# EAGLE board Xbee Communications Board (EAGLE 9.6.1)
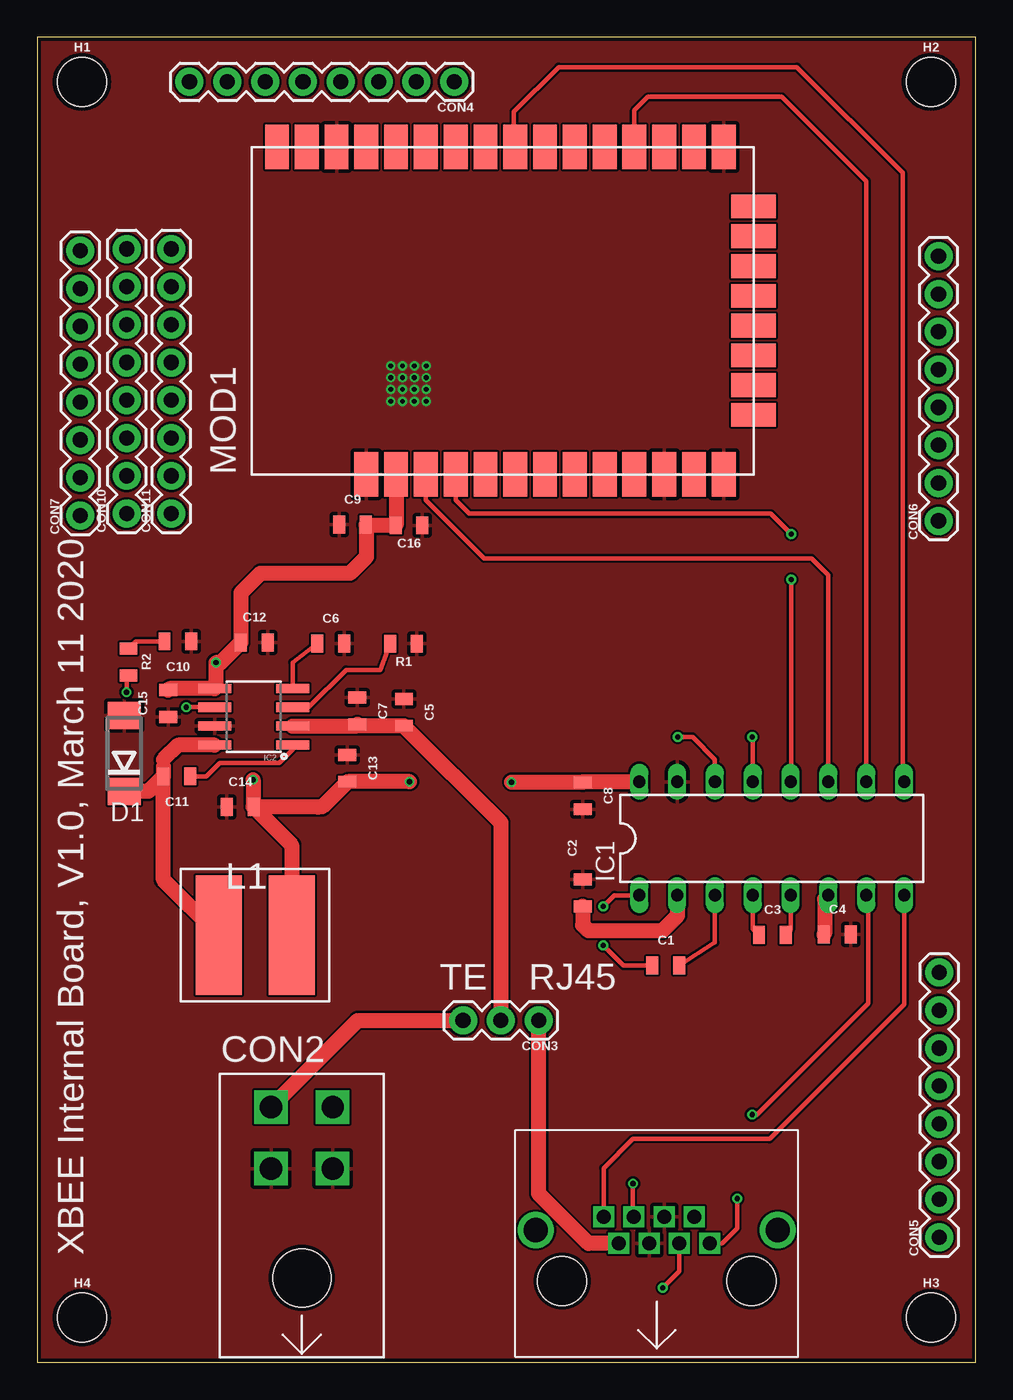
[diagram p0: board, top side]
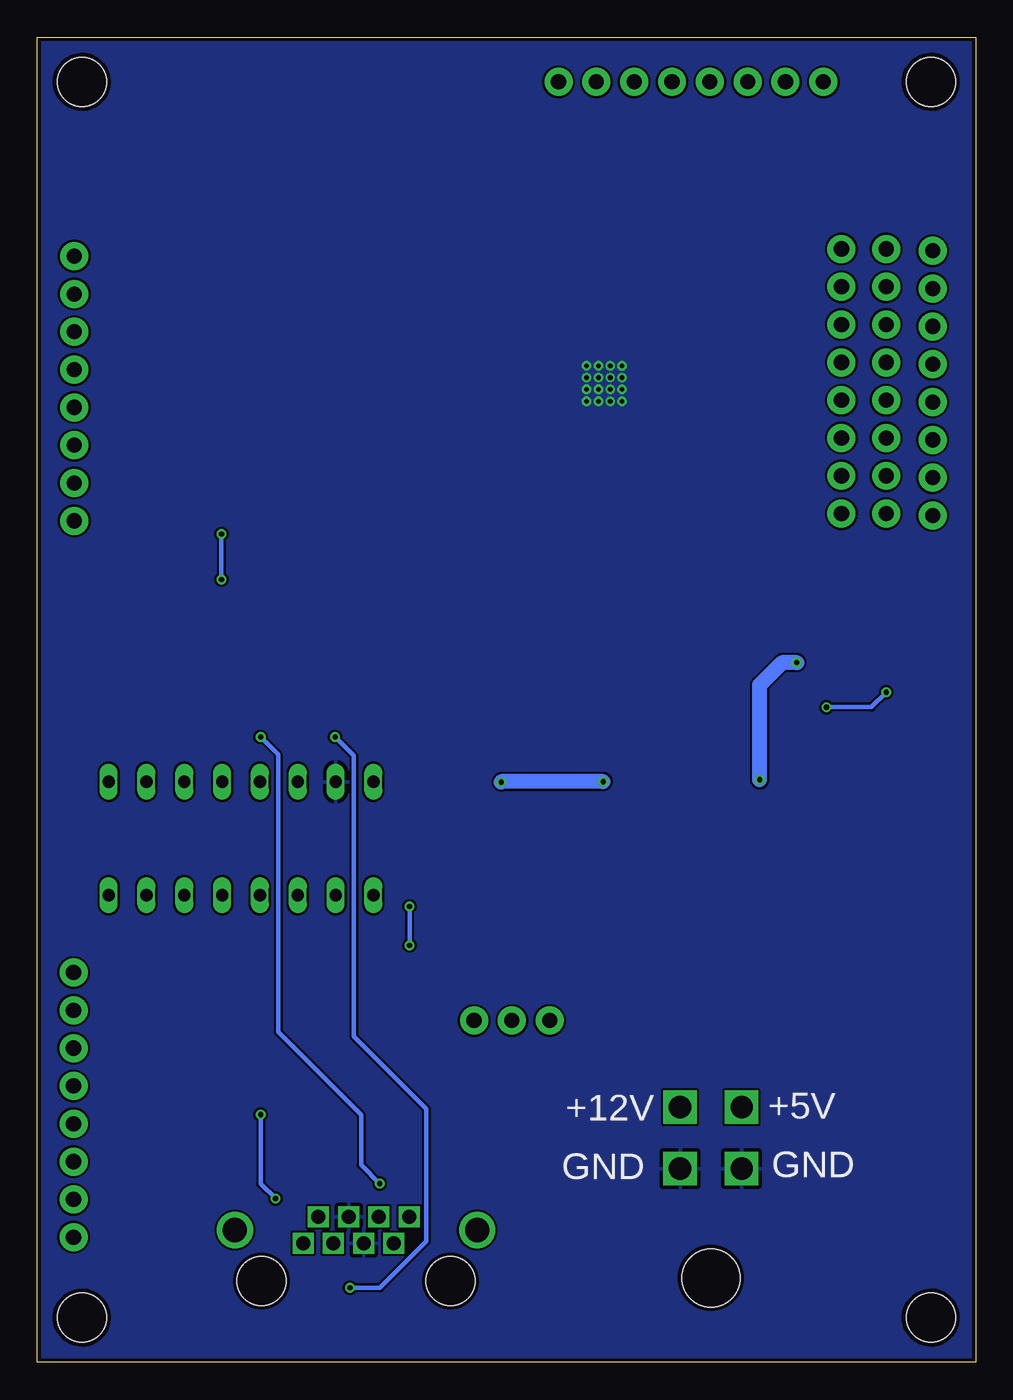
[diagram p1: board, bottom side, seen from below]

Size 63 x 89 mm. Coordinates in mm from the lower left corner, seen from the top.
Outline: 0,0 63,0 63,89 0,89 0,0
Copper layers (1*16): Top 0.035mm / dielectric 1.5mm / Bottom 0.035mm
Design rules "JLCPCB2Layer": minimum track width 6mil, minimum drill 10mil, track to track 6mil, track to pad 6mil, pad to pad 6mil, via to via 6mil, smd to smd 0mil, copper to edge 10mil, drill to drill 10mil, minimum pad ring 6mil, minimum via ring 6mil, stop-mask expansion 2mil, vias tented up to drill 100mil, thermal gap 10mil

## Footprints (pad centres in the part's own frame; a part is rotated, then mirrored left to right if it is on the bottom)
0805 = smd 0.8 x 1.2: 1 -0.9,0; 2 0.9,0
RJ45 = drill 0.94 square: 1 9.9,2.54; 2 8.88,4.32; 3 7.87,2.54; 4 6.85,4.32; 5 5.84,2.54; 6 4.82,4.32; 7 3.81,2.54; 8 2.79,4.32 | drill 1.62: 9 -1.78,3.43; 10 14.48,3.43 | hole 3.3: 0,0; 12.7,0
TE_4-PIN = drill 1.5 square: 1 2.07,11.48; 2 -2.07,11.48; 3 2.07,7.34; 4 -2.07,7.34 | hole 3.91: 0,0
1X03 = drill 1.016 pad 1.88: 1 0,0; 2 2.54,0; 3 5.08,0
1X08 = drill 1.016 pad 1.88: 1 0,0; 2 2.54,0; 3 5.08,0; 4 7.62,0; 5 10.16,0; 6 12.7,0; 7 15.24,0; 8 17.78,0
DO214AA = smd 1.8 x 2.2: A 2.55,0; C -2.55,0
STAND-OFF = hole 3.302: 0,0
DIP16 = drill 0.813 long: 1 -8.89,-3.81; 2 -6.35,-3.81; 3 -3.81,-3.81; 4 -1.27,-3.81; 5 1.27,-3.81; 6 3.81,-3.81; 7 6.35,-3.81; 8 8.89,-3.81; 9 8.89,3.81; 10 6.35,3.81; 11 3.81,3.81; 12 1.27,3.81; 13 -1.27,3.81; 14 -3.81,3.81; 15 -6.35,3.81; 16 -8.89,3.81
SOIC8 = smd 0.61 x 2.21: 1 -1.905,-2.616; 2 -0.635,-2.616; 3 0.635,-2.616; 4 1.905,-2.616; 5 1.905,2.616; 6 0.635,2.616; 7 -0.635,2.616; 8 -1.905,2.616
INDUCTOR_MURATA_DEM8030C = smd 3.1 x 8: P$1 0,0; P$2 4.9,0
XBEE_SX = smd 3 x 1.6: 1 0,24; 2 0,22; 3 0,20; 4 0,18; 5 0,16; 6 0,14; 7 0,12; 8 0,10; 9 0,8; 10 0,6; 11 0,4; 12 0,2; 13 0,0; 22 22,0; 23 22,2; 24 22,4; 25 22,6; 26 22,8; 27 22,10; 28 22,12; 29 22,14; 30 22,16; 31 22,18; 32 22,20; 33 22,22; 34 22,24; 35 22,26; 36 22,28; 37 22,30 | smd 1.6 x 3: 14 4,-2; 15 6,-2; 16 8,-2; 17 10,-2; 18 12,-2; 19 14,-2; 20 16,-2; 21 18,-2 | drill 0.32 pad 0.56: 38_1 4.919,22.359; 38_2 5.713,22.359; 38_3 6.506,22.359; 38_4 7.3,22.359; 38_5 4.919,21.565; 38_6 5.713,21.565; 38_7 6.506,21.565; 38_8 7.3,21.565; 38_9 4.919,20.771; 38_10 5.713,20.771; 38_11 6.506,20.771; 38_12 7.3,20.771; 38_13 4.919,19.977; 38_14 5.713,19.977; 38_15 6.506,19.977; 38_16 7.3,19.977

## Placement (x,y rotation side)
C1  0.1uf  [0805]  42.21,26.65 0 top
C2  0.1uf  [0805]  36.62,31.53 90 top
C3  0.1uf  [0805]  49.36,28.71 0 top
C4  0.1uf  [0805]  53.71,28.73 0 top
C5  10uf  [0805]  24.62,43.65 270 top
C6  10uf  [0805]  19.7,48.27 0 top
C7  0.1uf  [0805]  21.49,43.75 270 top
C8  0.1uf  [0805]  36.64,38.05 270 top
C9  100pf  [0805]  21.17,56.26 0 top
C10  2.2nf  [0805]  9.45,48.43 180 top
C11  0.1uf  [0805]  9.37,39.36 180 top
C12  10uf  [0805]  14.58,48.35 0 top
C13  10uf  [0805]  20.83,39.89 270 top
C14  10uf  [0805]  13.63,37.3 0 top
C15  0.1uf  [0805]  8.79,44.25 90 top
C16  1uf  [0805]  24.96,56.21 180 top
CON1  RJ45  [RJ45]  35.25,5.45 0 top
CON2  TE_4-PIN  [TE_4-PIN]  17.77,5.67 0 top
CON3  1X03  [1X03]  33.67,22.96 180 top
CON4  1X08  [1X08]  28,86 180 top
CON5  1X08  [1X08]  60.56,8.4 90 top
CON6  1X08  [1X08]  60.52,56.52 90 top
CON7  1X08  [1X08]  2.88,56.88 90 top
CON10  1X08  [1X08]  6,57 90 top
CON11  1X08  [1X08]  9,57 90 top
D1  [DO214AA]  5.83,40.9 90 top
H1  STAND-OFF  [STAND-OFF]  3,86 0 top
H2  STAND-OFF  [STAND-OFF]  60,86 0 top
H3  STAND-OFF  [STAND-OFF]  60,3 0 top
H4  STAND-OFF  [STAND-OFF]  3,3 0 top
IC1  RS232-TTL_ICL3232  [DIP16]  49.31,35.18 0 top
IC2  BUCK_TPS5403  [SOIC8]  14.53,43.36 90 top
L1  10uH  [INDUCTOR_MURATA_DEM8030C]  12.18,28.69 0 top
MOD1  XBEE_SX  [XBEE_SX]  46.09,59.63 90 top
R1  47k  [0805]  24.59,48.26 180 top
R2  47k  [0805]  6.13,47.04 270 top

## Library data of the parts
C1-C16 L1 R1 R2 = EcoCar-Passives
CON1 CON2 = EcoCar-Connectors
CON3-CON7 CON10 CON11 = EcoCar-Connectors-2.54mm
D1 = EcoCar-Discrete-Semiconductors
H1-H4 = EcoCar-Miscellaneous
IC1 IC2 = EcoCar-Integrated-Circuits
MOD1 = EcoCar-Modules

## Nets
3.3V: C8.1 C9.2 C12.1 C13.2 C14.2 C15.2 C16.2 IC1.16 IC2.5 L1.P$2 MOD1.2
5V: CON2.2 CON3.3
!CTS: CON1.8 IC1.8
!RTR: CON1.1 IC1.7
BOOT: C11.1 IC2.1
C1+: C1.1 IC1.1
C1-: C1.2 IC1.3
C2+: C3.1 IC1.4
C2-: C3.2 IC1.5
COMP: IC2.6 R2.2
CTS_XBEE: IC1.9 MOD1.29
GND: C2.2 C4.2 C5.1 C6.2 C7.1 C8.2 C9.1 C10.1 C12.2 C13.1 C14.1 C15.1 C16.1 CON1.4 CON1.5 CON2.3 CON2.4 D1.A IC1.15 IC2.7 MOD1.1 MOD1.11 MOD1.13 MOD1.22 MOD1.35 MOD1.38_1 MOD1.38_2 MOD1.38_3 MOD1.38_4 MOD1.38_5 MOD1.38_6 MOD1.38_7 MOD1.38_8 MOD1.38_9 MOD1.38_10 MOD1.38_11 MOD1.38_12 MOD1.38_13 MOD1.38_14 MOD1.38_15 MOD1.38_16 R1.1
LX: C11.2 D1.C IC2.8 L1.P$1
N$2: C10.2 R2.1
N/C: CON1.2
POWER: CON1.7 CON3.1
ROSC: IC2.3 R1.2
RTS_XBEE: IC1.10 MOD1.25
RX: CON1.6 IC1.13
RX_OUT: IC1.12 MOD1.4
SS: C6.1 IC2.4
TX: CON1.3 IC1.14
TX_OUT: IC1.11 MOD1.3
V+: C2.1 IC1.2
V-: C4.1 IC1.6
VIN: C5.2 C7.2 CON3.2 IC2.2

## Tracks (layer width: path | path; a pad name or v marks a point on that pad's centre or on a via)
3.3V  (via drill 0.35)
  Top 0.406: 12,45.35 IC2.5
  Top 1: IC2.5 11.9,45.25 8.89,45.25 C15.2 | C14.2 17.08,34.74 L1.P$2 | C14.2 18.87,37.3 19.13,37.3 C13.2 20.87,39 v25,39 | v14.49,39.13 14.49,37.33 C14.2 | v31.85,38.96 36.62,38.96 | 36.62,38.96 C8.1 | IC1.16 36.65,38.99 36.62,38.96 | MOD1.2 24.09,56.25 C16.2 22.12,56.21 | 22.12,56.21 C9.2 | 22.12,56.21 22.12,54.12 21,53 15,53 13.68,51.68 C12.1 12.33,47 v12,47 12,45.35
  Bottom 1: v12,47 12.98,47 14.49,45.49 v14.49,39.13 | v25,39 31.81,39 v31.85,38.96
5V
  Top 1: CON2.2 21.51,22.96 CON3.3
!CTS
  Top 0.305: IC1.8 58.2,24.03 49.17,15 40,15 38.04,13.04 CON1.8
!RTR  (via drill 0.35)
  Top 0.305: IC1.7 55.79,31.24 55.8,24.11 48.32,16.64 v48,16.64 | CON1.1 46,8 47,9 v47,11
  Bottom 0.305: v48,16.64 48,12 v47,11
BOOT
  Top 0.305: IC2.1 17.15,41.15 16.25,40.25 12.25,40.25 11.36,39.36 C11.1
C1+  (via drill 0.35)
  Top 0.305: v38,28 39.35,26.65 C1.1 | v38,30.62 38.75,31.37 IC1.1
  Bottom 0.305: v38,28 v38,30.62
C1-
  Top 0.305: C1.2 45.5,28.19 IC1.3
C2+
  Top 0.305: IC1.4 48.04,29.12 C3.1
C2-
  Top 0.305: IC1.5 50.58,29.03 C3.2
COMP  (via drill 0.35)
  Top 0.305: IC2.6 v10,44 | R2.2 6,46.01 v6,45
  Bottom 0.305: v6,45 7,44 v10,44
CTS_XBEE
  Top 0.305: IC1.9 58.1,39.1 58.1,79.9 51,87 35,87 32,84 32,81.72 MOD1.29
GND
  pour Top: -2,91 -2,-2 65,-2 65,91
  pour Bottom: -3,92 66,92 66,-3 -3,-3
LX
  Top 0.5: 8.47,40.47 8.47,40
  Top 1: IC2.8 9.46,41.46 8.47,40.47 | 8.47,40 C11.2 | C11.2 7.46,38.35 D1.C | L1.P$1 8.47,32.4 C11.2
N$2
  Top 0.305: C10.2 6.62,48.43 R2.1
POWER
  Top 1: CON1.7 37.01,7.99 33.67,11.33 CON3.1
ROSC
  Top 0.305: IC2.3 18.24,44 20.75,46.51 23.04,46.51 R1.2
RTS_XBEE
  Top 0.305: IC1.10 55.66,79.34 50,85 41,85 40.09,84.09 MOD1.25
RX  (via drill 0.35)
  Top 0.305: CON1.6 40,9.84 v40,12 | IC1.13 48.04,41.96 v48,42
  Bottom 0.305: v40,12 41.25,13.25 41.25,16.64 46.82,22.2 46.82,40.82 v48,42
RX_OUT  (via drill 0.35)
  Top 0.305: MOD1.4 28.09,57.91 29,57 49.26,57 v50.63,55.63 | IC1.12 50.58,39.53 50.63,39.58 v50.63,52.58
  Bottom 0.305: v50.63,55.63 v50.63,52.58
SS
  Top 0.305: C6.1 17.15,47 IC2.4
TX  (via drill 0.35)
  Top 0.305: CON1.3 43.12,6.12 v42,5 | IC1.14 45.5,40.5 44,42 v43,42
  Bottom 0.305: v42,5 40,5 36.87,8.13 36.87,17.02 41.75,21.89 41.75,40.75 v43,42
TX_OUT
  Top 0.305: MOD1.3 26.09,57.91 30,54 52,54 53.12,52.88 IC1.11
V+
  Top 1: C2.1 36.62,29.38 37,29 42,29 43,30 43,31.34 IC1.2
V-
  Top 1: IC1.6 52.87,31.12 52.87,28.79 C4.1
VIN
  Top 1: IC2.2 21.37,42.73 21.4,42.75 | 21.4,42.75 C7.2 | 21.4,42.75 C5.2 31.13,36.24 CON3.2

## Text on the board
tPlace: TE | RJ45 | XBEE Internal Board, V1.0, March 11 2020